# EAGLE board Wooby (EAGLE 9.6.2)
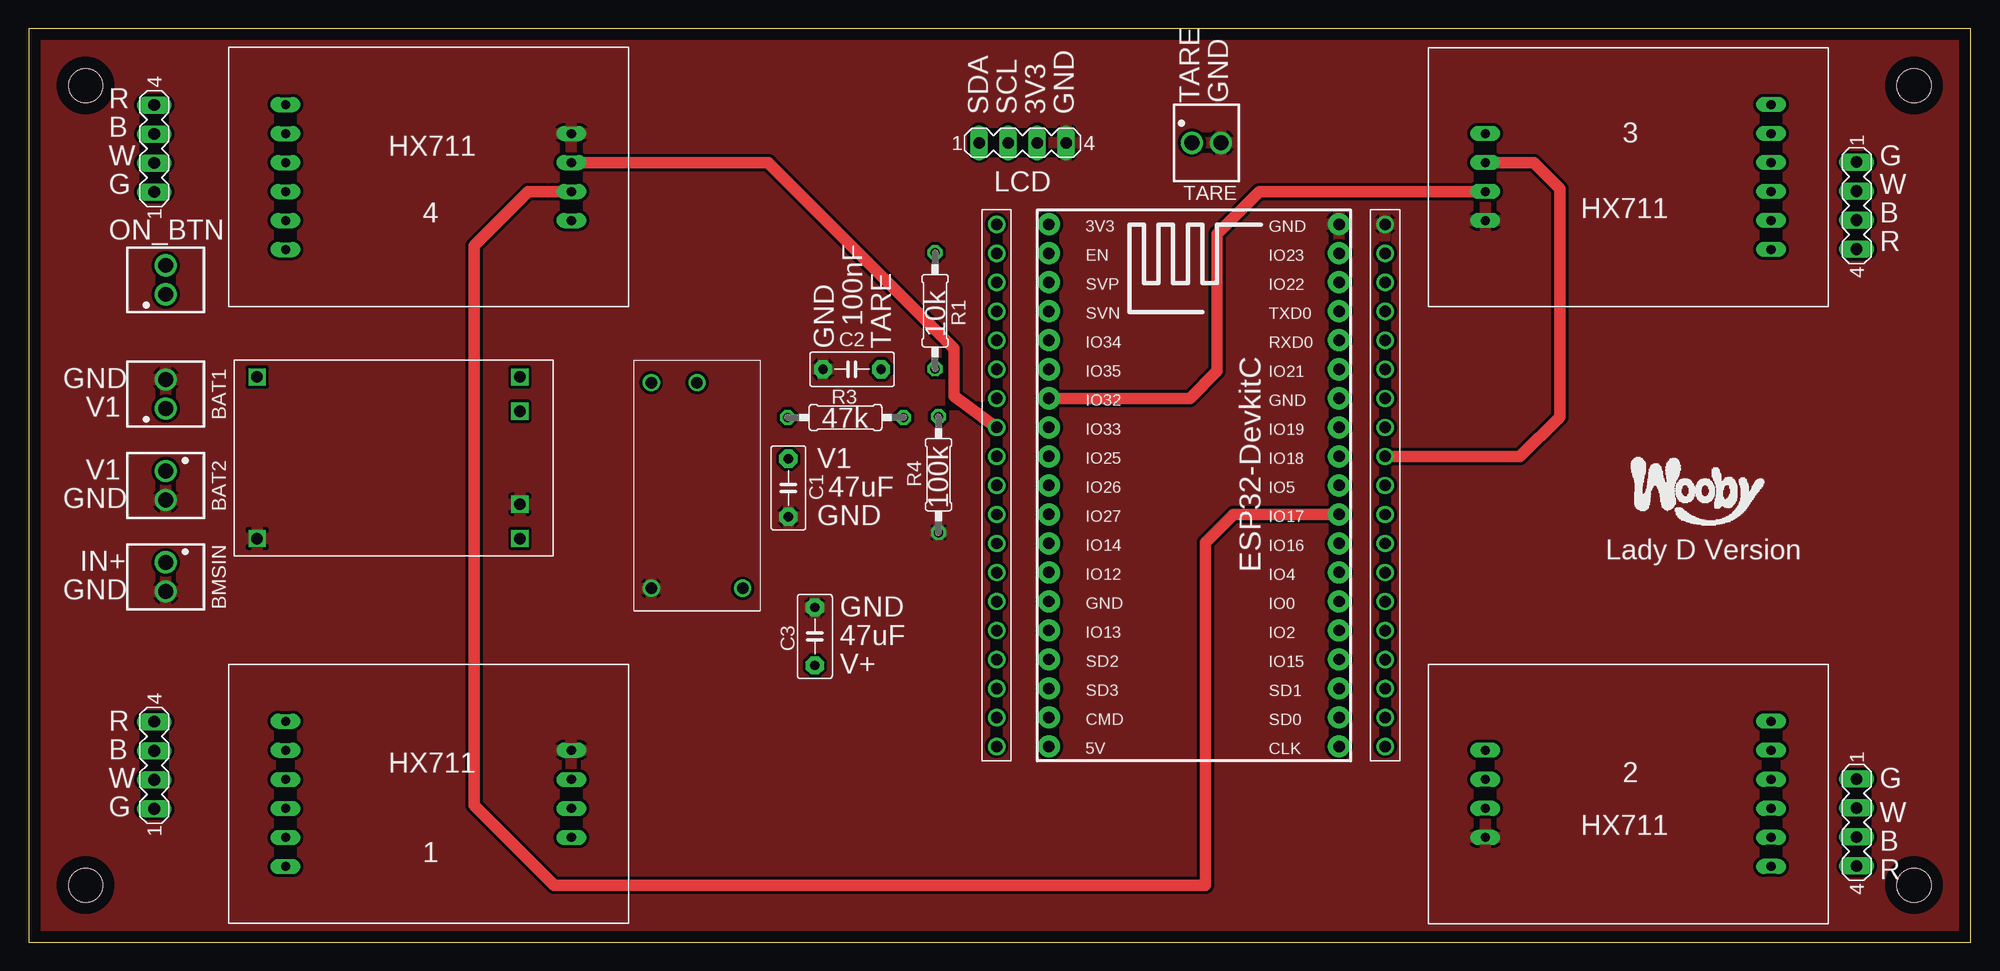
[diagram p0: board, top side]
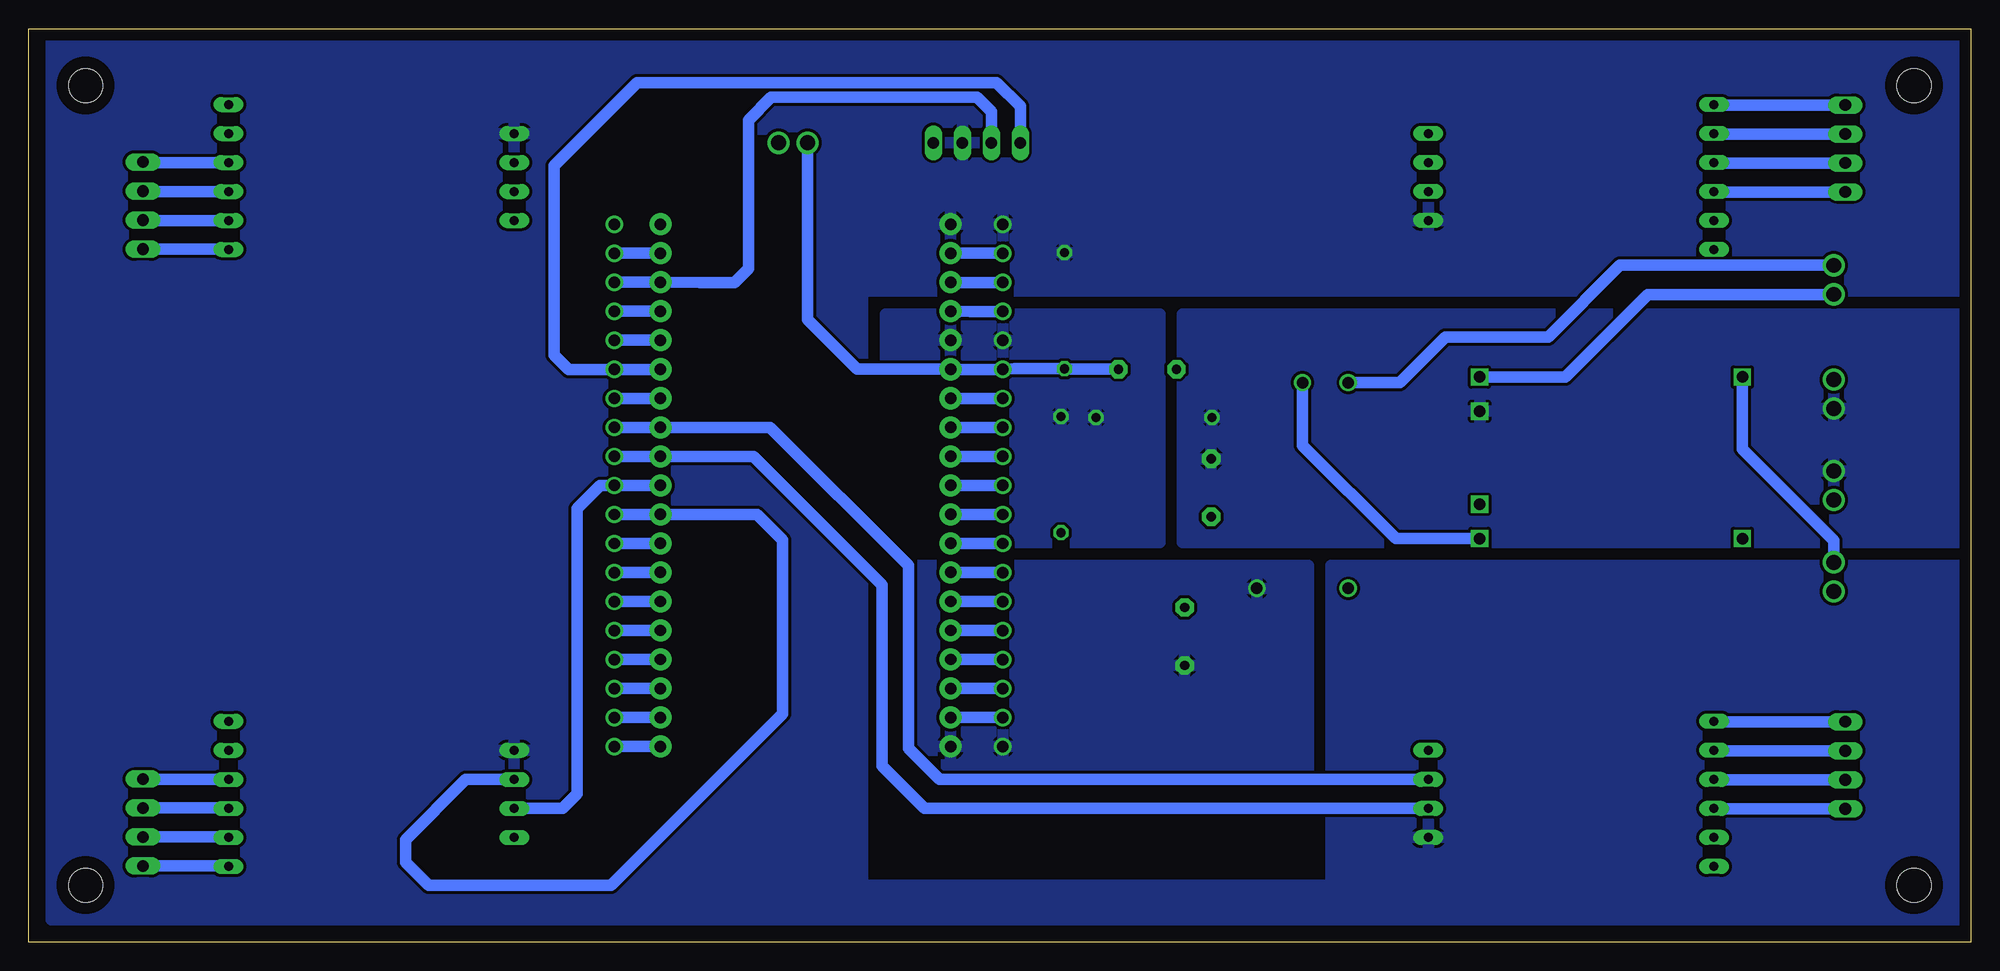
[diagram p1: board, bottom side, seen from below]

Size 170 x 80 mm. Coordinates in mm from the lower left corner, seen from the top.
Outline: 0,0 170,0 170,80 0,80 0,0
Copper layers (1*16): Top 0.035mm / dielectric 1.5mm / Bottom 0.035mm
Design rules "default *": minimum track width 6mil, minimum drill 0.35mm, track to track 10mil, track to pad 10mil, pad to pad 10mil, via to via 10mil, smd to smd 10mil, copper to edge 40mil, drill to drill 6mil, minimum pad ring 10mil, minimum via ring 8mil, stop-mask expansion 4mil, vias tented up to drill 0mil, thermal gap 10mil
Holes 3 mm at 5,75 5,5 165,5 165,75

## Footprints (pad centres in the part's own frame; a part is rotated, then mirrored left to right if it is on the bottom)
691210910002 = drill 1.3: 1 -1.27,0; 2 1.27,0
C5B3 = drill 0.813 pad 1.6 octagon: 1 -2.54,0; 2 2.54,0
ESP32-DEVKITC = drill 1 pad 1.93: 1 -22.87,-12.7; 2 -20.33,-12.7; 3 -17.79,-12.7; 4 -15.25,-12.7; 5 -12.71,-12.7; 6 -10.17,-12.7; 7 -7.63,-12.7; 8 -5.09,-12.7; 9 -2.55,-12.7; 10 -0.01,-12.7; 11 2.53,-12.7; 12 5.07,-12.7; 13 7.61,-12.7; 14 10.15,-12.7; 15 12.69,-12.7; 16 15.23,-12.7; 17 17.77,-12.7; 18 20.31,-12.7; 19 22.85,-12.7; 20 22.85,12.7; 21 20.31,12.7; 22 17.77,12.7; 23 15.23,12.7; 24 12.69,12.7; 25 10.15,12.7; 26 7.61,12.7; 27 5.07,12.7; 28 2.53,12.7; 29 -0.01,12.7; 30 -2.55,12.7; 31 -5.09,12.7; 32 -7.63,12.7; 33 -10.17,12.7; 34 -12.71,12.7; 35 -15.25,12.7; 36 -17.79,12.7; 37 -20.33,12.7; 38 -22.87,12.7
MA04-1 = drill 1.016 long: 1 -3.81,0; 2 -1.27,0; 3 1.27,0; 4 3.81,0
0207/10 = drill 0.813 octagon: 1 -5.08,0; 2 5.08,0
HX711 = drill 0.8 long: A0 -12.5,6.35; A1 -12.5,3.81; A2 -12.5,1.27; A3 -12.5,-1.27; A4 -12.5,-3.81; A5 -12.5,-6.35; D0 12.5,3.81; D1 12.5,1.27; D2 12.5,-1.27; D3 12.5,-3.81
STEPUPCONVERTO5V8V = drill 1: IN+ 2,-9.5; IN- 2,-5.5; OUT+ 20,-1.5; OUT- 20,-9.5
BMS = drill 1 square: B+ 25,-4.5; B- 25,-12.65; IN+ 2,-1.5; IN- 2,-15.65; OUT+ 25,-1.5; OUT- 25,-15.65
READER = drill 1: P1 1.27,2.54; P2 1.27,5.08; P3 1.27,7.62; P4 1.27,10.16; P5 1.27,12.7; P6 1.27,15.24; P7 1.27,17.78; P8 1.27,20.32; P9 1.27,22.86; P10 1.27,25.4; P11 1.27,27.94; P12 1.27,30.48; P13 1.27,33.02; P14 1.27,35.56; P15 1.27,38.1; P16 1.27,40.64; P17 1.27,43.18; P18 1.27,45.72; P19 1.27,48.26

## Placement (x,y rotation side)
BAT1  691210910002  [691210910002]  12,48 90 top
BAT2  691210910002  [691210910002]  12,40 270 top
BMSIN  691210910002  [691210910002]  12,32 270 top
C1  [C5B3]  66.5,39.79 270 top
C2  [C5B3]  72.07,50.17 180 top
C3  [C5B3]  68.82,26.78 90 top
ESP32-DEVKITC  ESP32DEVKITC  [ESP32-DEVKITC]  102,40 270 top
LCD  [MA04-1]  87,70 0 top
ON_BTN  691210910002  [691210910002]  12,58 90 top
R1  5K7  [0207/10]  79.34,55.3 90 top
R3  [0207/10]  71.5,45.95 180 top
R4  [0207/10]  79.64,40.95 90 top
SM1  [HX711]  35,13 0 top
SM2  [HX711]  140,67 180 top
SM3  [HX711]  35,67 0 top
SM4  [HX711]  140,13 180 top
SUC5V8V  STEPUPCONVERTOR5V8V  [STEPUPCONVERTO5V8V]  64,51 270 top
SV1  [MA04-1]  11,15.5 90 top
SV2  [MA04-1]  160,64.5 270 top
SV3  [MA04-1]  11,69.5 90 top
SV4  [MA04-1]  160,10.5 270 top
TARE  691210910002  [691210910002]  103.09,70 0 top
U$1  BMS  [BMS]  18,51 0 top
U$2  READER  [READER]  86,65.4 180 top
U$3  READER  [READER]  120,65.4 180 top

## Library data of the parts
BAT1 BAT2 BMSIN ON_BTN TARE = 691210910002; AVAILABILITY: Warning; DESCRIPTION: 2 Position Wire to Board Terminal Block Horizontal with Board 0.100 (2.54mm) Through Hole; MF: Würth Elektronik; MP: 691210910002; PACKAGE: None; PRICE: None; PURCHASE-URL: https://pricing.snapeda.com/search/part/691210910002/?ref=eda
C1-C3 = capacitor-wima
ESP32-DEVKITC = ESP32
LCD SV1-SV4 = con-lstb; OC_FARNELL: unknown; OC_NEWARK: unknown
R1 R3 R4 = rcl; SPICEPREFIX: R
SM1-SM4 = hx711
SUC5V8V = stepUpConverto5V8V
U$1 = BMS
U$2 U$3 = READER

## Nets
+3V3: ESP32-DEVKITC.1 LCD.3 R1.2 SM1.D3 SM2.D3 SM3.D3 SM4.D3 U$2.P1
BATS: ESP32-DEVKITC.5 R3.1 R4.2 U$2.P5
GND: BAT1.2 BAT2.2 BMSIN.2 C1.2 C2.2 C3.2 ESP32-DEVKITC.38 LCD.4 R4.1 SM1.D0 SM2.D0 SM3.D0 SM4.D0 SUC5V8V.OUT- TARE.2 U$1.B- U$1.IN- U$3.P1
N$1: SM1.A1 SV1.3
N$2: SM1.A0 SV1.4
N$3: SM1.A3 SV1.1
N$4: SM1.A2 SV1.2
N$5: ESP32-DEVKITC.7 SM2.D1 U$2.P7
N$6: ESP32-DEVKITC.36 LCD.2 U$3.P3
N$7: ESP32-DEVKITC.33 LCD.1 U$3.P6
N$8: ESP32-DEVKITC.28 SM3.D2 SM4.D2 U$3.P11
N$9: ESP32-DEVKITC.31 SM1.D1 U$3.P8
N$10: ESP32-DEVKITC.30 SM1.D2 SM2.D2 U$3.P9
N$11: ESP32-DEVKITC.8 SM3.D1 U$2.P8
N$12: ESP32-DEVKITC.29 SM4.D1 U$3.P10
N$13: SM4.A0 SV4.4
N$14: SM4.A1 SV4.3
N$15: SM4.A2 SV4.2
N$16: SM4.A3 SV4.1
N$17: SM3.A0 SV3.4
N$18: SM3.A1 SV3.3
N$19: SM3.A2 SV3.2
N$20: SM3.A3 SV3.1
N$21: SM2.A0 SV2.4
N$22: SM2.A1 SV2.3
N$23: SM2.A2 SV2.2
N$24: SM2.A3 SV2.1
N$25: SUC5V8V.IN- U$1.OUT-
N$26: ON_BTN.1 U$1.OUT+
N$27: BMSIN.1 U$1.IN+
N$28: ESP32-DEVKITC.18 U$2.P18
N$29: ESP32-DEVKITC.17 U$2.P17
N$30: ESP32-DEVKITC.16 U$2.P16
N$31: ESP32-DEVKITC.15 U$2.P15
N$32: ESP32-DEVKITC.14 U$2.P14
N$33: ESP32-DEVKITC.13 U$2.P13
N$34: ESP32-DEVKITC.12 U$2.P12
N$35: ESP32-DEVKITC.11 U$2.P11
N$36: ESP32-DEVKITC.10 U$2.P10
N$37: ESP32-DEVKITC.9 U$2.P9
N$38: ESP32-DEVKITC.4 U$2.P4
N$39: ESP32-DEVKITC.3 U$2.P3
N$40: ESP32-DEVKITC.2 U$2.P2
N$41: ESP32-DEVKITC.20 U$3.P19
N$42: ESP32-DEVKITC.21 U$3.P18
N$43: ESP32-DEVKITC.22 U$3.P17
N$44: ESP32-DEVKITC.23 U$3.P16
N$45: ESP32-DEVKITC.24 U$3.P15
N$46: ESP32-DEVKITC.25 U$3.P14
N$47: ESP32-DEVKITC.26 U$3.P13
N$48: ESP32-DEVKITC.27 U$3.P12
N$49: ESP32-DEVKITC.32 U$3.P7
N$50: ESP32-DEVKITC.34 U$3.P5
N$51: ESP32-DEVKITC.35 U$3.P4
N$52: ON_BTN.2 SUC5V8V.IN+
N$53: ESP32-DEVKITC.37 U$3.P2
TARE: C2.1 ESP32-DEVKITC.6 R1.1 TARE.1 U$2.P6
V1: BAT1.1 BAT2.1 C1.1 R3.2 U$1.B+
V+: C3.1 ESP32-DEVKITC.19 SUC5V8V.OUT+ U$2.P19

## Tracks (layer width: path | path; a pad name or v marks a point on that pad's centre or on a via)
+3V3
  pour Bottom: 1,33 1,2 168,2 168,79 1,79 1,57 97,57 97,5 56,5 56,33
BATS
  pour Bottom: 71,55 95,55 95,35 71,35
GND
  pour Top: 0,80 170,80 170,0 0,0
N$1
  Bottom 1.016: SV1.3 22.46,16.77 SM1.A1
N$2
  Bottom 1.016: SV1.4 22.46,19.31 SM1.A0
N$3
  Bottom 1.016: SV1.1 22.46,11.69 SM1.A3
N$4
  Bottom 1.016: SV1.2 22.46,14.23 SM1.A2
N$5
  Top 1.016: ESP32-DEVKITC.7 101.63,47.63 104,50 104,62 107.73,65.73 SM2.D1
  Bottom 1.016: ESP32-DEVKITC.7 U$2.P7
N$6
  Bottom 1.016: LCD.2 85.73,72.73 87,74 105,74 107,72 107,59 108.22,57.78 111.24,57.78 ESP32-DEVKITC.36 U$3.P3
N$7
  Bottom 1.016: LCD.1 83.19,73.19 85.27,75.27 116.73,75.27 124,68 124,51.43 122.73,50.16 U$3.P6 ESP32-DEVKITC.33
N$8
  Top 1.016: ESP32-DEVKITC.28 105.47,37.47 103,35 103,5 46,5 39,12 39,61 43.69,65.69 43.71,65.73 SM3.D2
  Bottom 1.016: U$3.P11 ESP32-DEVKITC.28 106.23,37.47 104,35.24 104,20 119,5 135,5 137,7 137,9 131.73,14.27 SM4.D2
N$9
  Bottom 1.016: U$3.P8 110.24,45.08 ESP32-DEVKITC.31 105.09,45.09 93,33 93,17 90.27,14.27 SM1.D1
N$10
  Top 1.016: U$3.P9 130.54,42.54 134,46 134,66 131.73,68.27 SM2.D2
  Bottom 1.016: U$3.P9 115.72,42.55 ESP32-DEVKITC.30 106.55,42.55 95.31,31.31 95.31,15.44 91.6,11.73 SM1.D2
N$11
  Top 1.016: SM3.D1 64.77,68.27 64.77,68.23 81,52 81,47.81 U$2.P8
  Bottom 1.016: U$2.P8 ESP32-DEVKITC.8
N$12
  Bottom 1.016: ESP32-DEVKITC.29 115.72,40.01 U$3.P10 120,40 122,38 122,13 123.27,11.73 SM4.D1
N$13
  Bottom 1.016: SV4.4 152.54,6.69 SM4.A0
N$14
  Bottom 1.016: SV4.3 152.54,9.23 SM4.A1
N$15
  Bottom 1.016: SV4.2 152.54,11.77 SM4.A2
N$16
  Bottom 1.016: SV4.1 159.96,14.27 SM4.A3
N$17
  Bottom 1.016: SM3.A0 22.46,73.31 SV3.4
N$18
  Bottom 1.016: SM3.A1 22.46,70.77 SV3.3
N$19
  Bottom 1.016: SM3.A2 22.46,68.23 SV3.2
N$20
  Bottom 1.016: SM3.A3 22.46,65.69 SV3.1
N$21
  Bottom 1.016: SV2.4 152.54,60.69 SM2.A0
N$22
  Bottom 1.016: SV2.3 159.96,63.19 SM2.A1
N$23
  Bottom 1.016: SM2.A2 159.96,65.73 SV2.2
N$24
  Bottom 1.016: SV2.1 159.96,68.27 SM2.A3
N$25
  Bottom 1.016: SUC5V8V.IN- 58.5,43.5 50.35,35.35 U$1.OUT-
N$26
  Bottom 1.016: ON_BTN.1 28.27,56.73 35.5,49.5 U$1.OUT+
N$27
  Bottom 1.016: BMSIN.1 12,35.18 20,43.18 U$1.IN+
N$28
  Bottom 1.016: U$2.P18 ESP32-DEVKITC.18
N$29
  Bottom 1.016: U$2.P17 ESP32-DEVKITC.17
N$30
  Bottom 1.016: U$2.P16 ESP32-DEVKITC.16
N$31
  Bottom 1.016: U$2.P15 ESP32-DEVKITC.15
N$32
  Bottom 1.016: U$2.P14 ESP32-DEVKITC.14
N$33
  Bottom 1.016: U$2.P13 ESP32-DEVKITC.13
N$34
  Bottom 1.016: U$2.P12 ESP32-DEVKITC.12
N$35
  Bottom 1.016: U$2.P11 ESP32-DEVKITC.11
N$36
  Bottom 1.016: U$2.P10 ESP32-DEVKITC.10
N$37
  Bottom 1.016: U$2.P9 ESP32-DEVKITC.9
N$38
  Bottom 1.016: 88.57,55.24 ESP32-DEVKITC.4 87.57,55.24 U$2.P4
N$39
  Bottom 1.016: U$2.P3 ESP32-DEVKITC.3
N$40
  Bottom 1.016: U$2.P2 87.57,60.32 ESP32-DEVKITC.2
N$41
  Bottom 1.016: ESP32-DEVKITC.20 115.72,17.15 U$3.P19
N$42
  Bottom 1.016: ESP32-DEVKITC.21 U$3.P18
N$43
  Bottom 1.016: ESP32-DEVKITC.22 115.72,22.23 U$3.P17
N$44
  Bottom 1.016: ESP32-DEVKITC.23 U$3.P16
N$45
  Bottom 1.016: ESP32-DEVKITC.24 115.72,27.31 U$3.P15
N$46
  Bottom 1.016: ESP32-DEVKITC.25 U$3.P14
N$47
  Bottom 1.016: ESP32-DEVKITC.26 115.72,32.39 U$3.P13
N$48
  Bottom 1.016: ESP32-DEVKITC.27 U$3.P12
N$49
  Bottom 1.016: ESP32-DEVKITC.32 115.72,47.63 U$3.P7
N$50
  Bottom 1.016: ESP32-DEVKITC.34 U$3.P5
N$51
  Bottom 1.016: ESP32-DEVKITC.35 U$3.P4
N$52
  Bottom 1.016: SUC5V8V.IN+ 50,49 46,53 37,53 30.73,59.27 ON_BTN.2
N$53
  Bottom 1.016: ESP32-DEVKITC.37 U$3.P2
TARE
  Bottom 1.016: C2.1 79.29,50.17 R1.1 83.67,50.22 U$2.P6 ESP32-DEVKITC.6 97.47,50.17 101.82,54.52 TARE.1
V1
  pour Bottom: 69,35 1,35 1,55 69,55
V+
  pour Bottom: 58,33 58,7 95,7 95,33

## Text on the board
tNames: TARE | GND | R | SDA | SCL | 3V3 | GND | B | 3 | W | LCD | G | G | W | 4 | B | ON_BTN | R | 100nF | 10k | GND | TARE | GND | 47k | V1 | V1 | V1 | 47uF | GND | 100k | GND | Lady D Version | IN+ | GND | GND | 47uF | V+ | R | B | W | 2 | G | G | W | B | 1 | R